# Altium PCB fpga.PcbDoc (part 4 of 6)
Units mm, origin at the board's own origin, x right, y up, seen from the top; angles counter-clockwise.
Board outline 111.63 x 111 mm, 2 copper layers (Top Layer, Bottom Layer); 5 components, 0 nets, 896 pads, 0 vias.
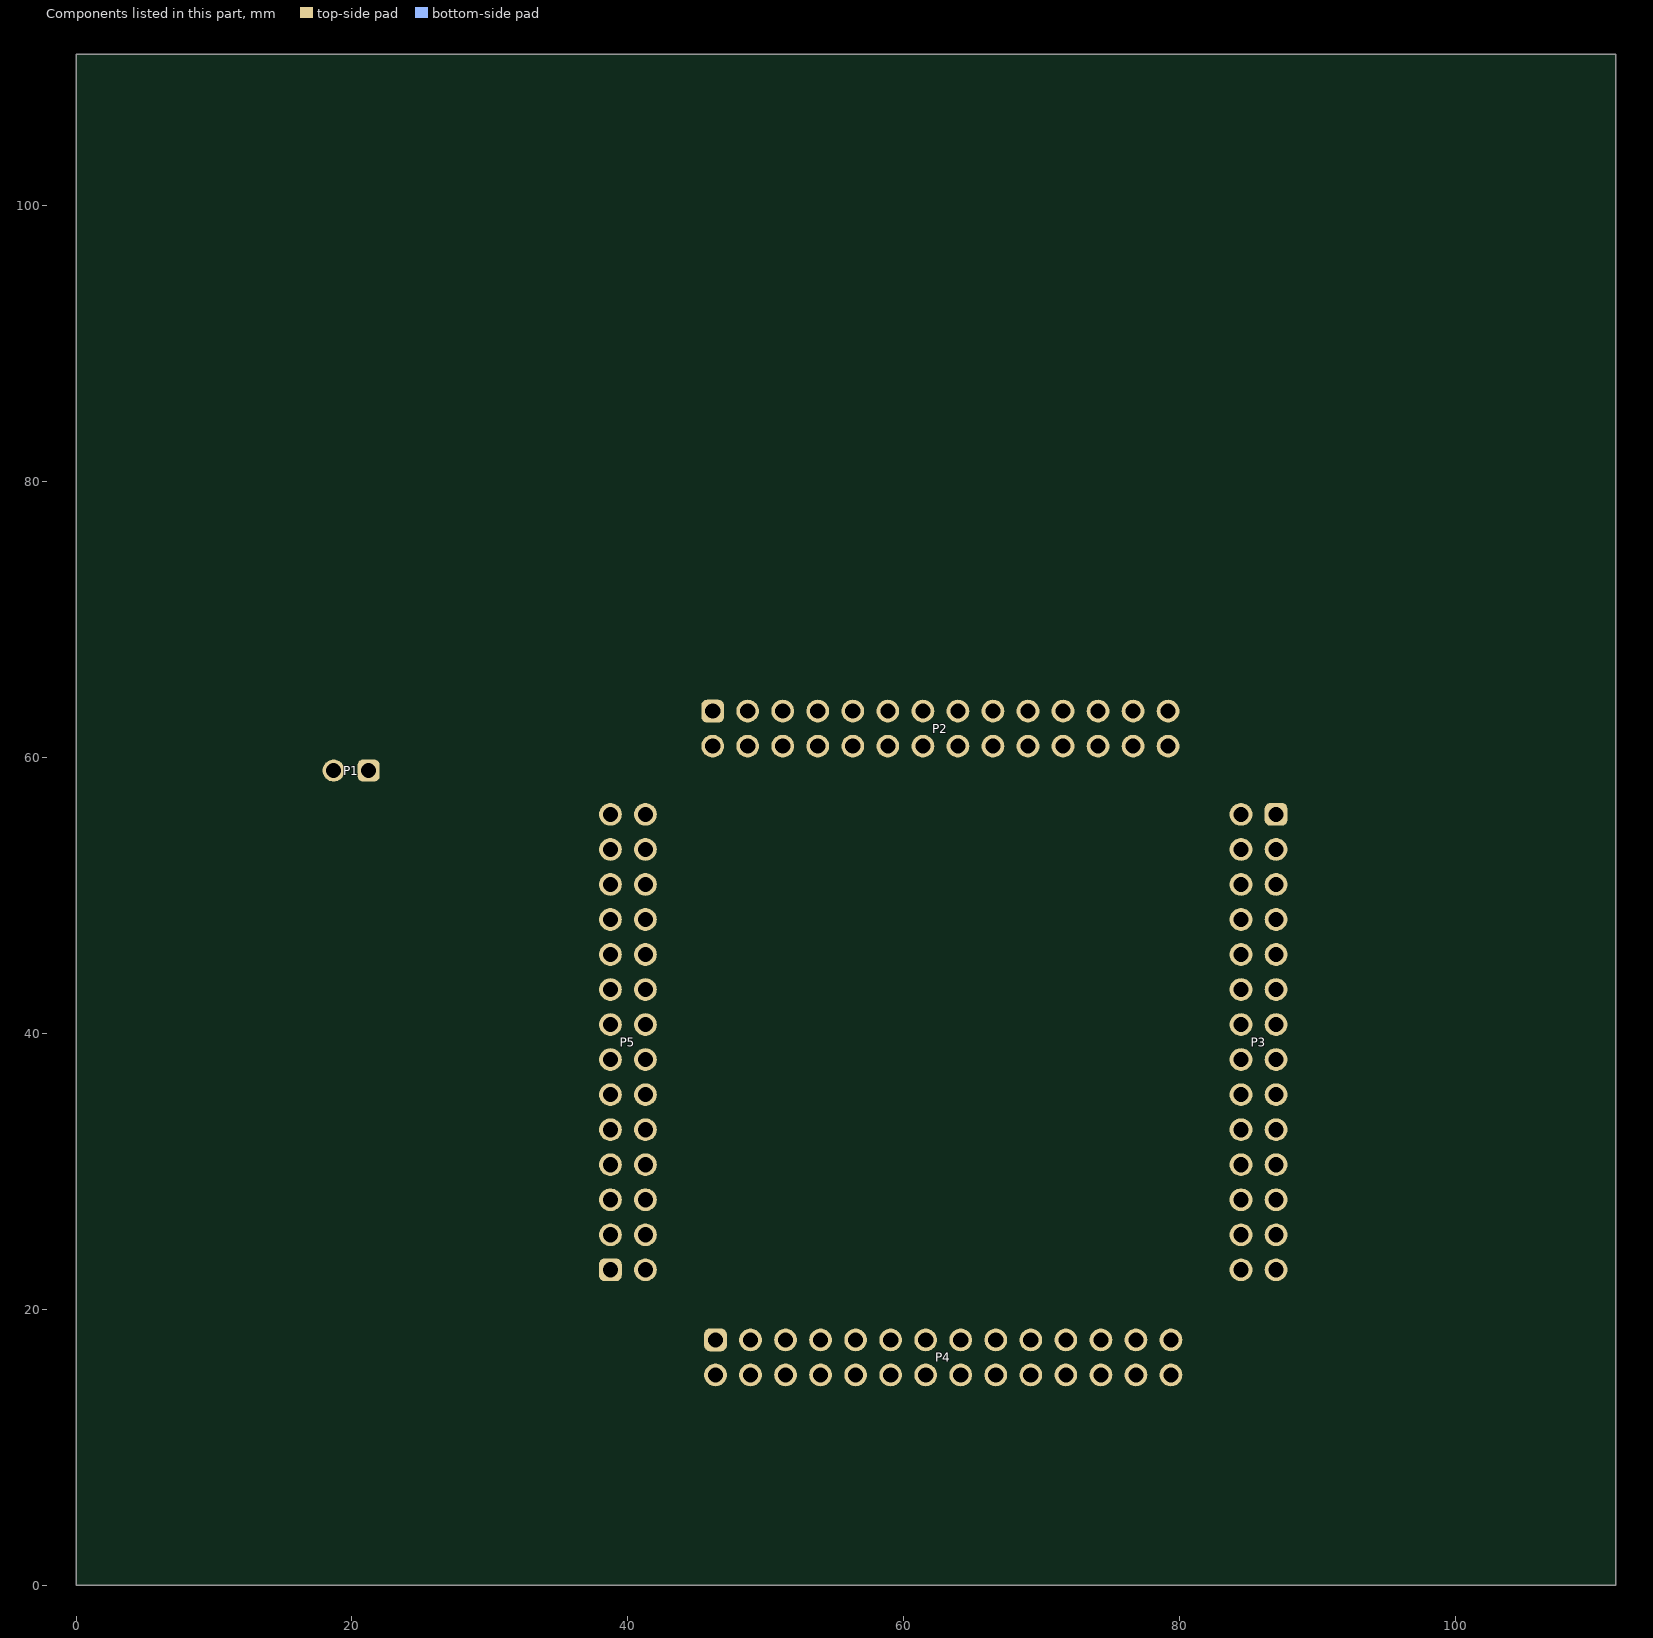
[diagram p4: the components of this part, seen from the top]

## Nets (pads, with @x,y where several pads share a name; then routed paths per layer and width w, separated by ;. In a path a pad name is that pad's centre, name@x,y a point inside that pad or via, vN(x,y) a via of type N, cw(c..) or ccw(c..) an arc to the next point about the centre after c; other vN are vias at no path point) (continued)
copper on no net: (continued)
  Top Layer w0.027: 5.697,35.195 5.722,35.22 5.747,35.195 ; 5.722,22.62 5.722,23.145 ; 5.722,22.62 5.747,22.595 ; 5.722,23.145 5.747,23.12 ; 5.722,28.295 5.722,27.845 5.747,27.82 ; 5.722,28.295 5.747,28.27 5.747,27.82 ; 5.722,29.67 5.722,30.145 ; 5.722,29.67 5.747,29.645 ; 5.722,30.145 5.747,30.12 ; 5.722,33.82 5.747,33.795 5.772,33.82 ; 5.747,22.595 8.872,22.595 ; 5.747,22.595 5.747,23.12 ; 5.747,23.12 5.772,23.145 ; 5.747,27.82 5.772,27.845 5.797,27.82 ; 5.747,29.645 5.747,30.12 ; 5.747,29.645 5.772,29.645 ; 5.747,30.12 5.772,30.145 ; 5.747,35.195 8.322,35.195 ; 5.772,23.145 5.772,22.595 5.797,22.57 ; 5.772,23.145 5.797,23.12 5.797,22.57 ; 5.772,29.645 5.772,30.145 ; 5.772,29.645 5.797,29.67 5.847,29.62 ; 5.772,29.645 5.797,29.62 5.822,29.645 ; 5.772,33.295 5.772,33.82 ; 5.797,22.57 5.822,22.595 5.847,22.57 ; 5.797,27.82 8.322,27.82 ; 5.797,35.17 5.822,35.195 5.847,35.17 ; 5.822,29.645 6.697,29.645 6.697,31.395 6.947,31.395 6.947,29.845 ; 5.822,33.795 5.847,33.77 5.872,33.795 ; 5.822,36.245 5.822,36.72 ; 5.847,22.57 5.872,22.595 ; 5.847,29.62 5.872,29.645 ; 5.847,35.17 8.472,35.17 ; 5.847,35.17 5.847,35.645 ; 5.872,22.595 5.872,23.12 ; 5.872,22.595 5.897,22.57 ; 5.872,23.12 5.897,23.095 ; 5.872,29.645 5.872,30.12 ; 5.872,29.645 5.897,29.62 ; 5.872,30.12 5.897,30.095 ; 5.872,33.795 5.872,33.295 5.897,33.27 ; 5.872,33.795 5.897,33.77 5.897,33.27 ; 5.897,22.57 6.897,22.57 ; 5.897,22.57 5.897,23.095 ; 5.897,23.095 5.922,23.12 ; 5.897,29.62 5.897,30.095 ; 5.897,29.62 5.922,29.62 ; 5.897,30.095 5.922,30.12 ; 5.897,35.145 5.922,35.17 5.947,35.145 ; 5.922,23.12 5.922,22.57 5.947,22.545 ; 5.922,23.12 5.947,23.095 5.947,22.545 ; 5.922,27.795 6.747,27.795 ; 5.922,29.62 5.922,30.12 ; 5.922,29.62 5.947,29.645 5.997,29.595 ; 5.922,29.62 5.947,29.595 5.972,29.62 ; 5.947,22.545 5.972,22.57 5.997,22.545 ; 5.947,35.145 8.622,35.145 ; 5.947,36.22 5.947,36.695 ; 5.947,36.695 5.972,36.67 5.997,36.695 ; 5.972,29.62 6.672,29.62 6.672,31.37 6.847,31.545 ; 5.972,33.77 5.972,33.27 5.997,33.245 ; 5.972,33.77 5.997,33.745 ; 5.972,35.62 5.997,35.595 6.022,35.62 ; 5.997,22.545 6.022,22.57 ; 5.997,29.595 6.022,29.62 6.047,29.595 ; 5.997,33.245 5.997,33.745 ; 5.997,33.245 6.022,33.27 ; 5.997,33.745 6.022,33.77 ; 6.022,22.57 6.022,23.095 ; 6.022,23.095 6.047,23.07 ; 6.022,33.27 6.022,33.77 ; 6.022,33.27 6.047,33.245 ; 6.022,33.77 6.047,33.745 ; 6.022,35.62 6.022,35.145 6.047,35.12 ; 6.022,35.62 6.047,35.595 6.047,35.12 ; 6.047,23.07 6.047,22.52 6.072,22.545 ; 6.047,23.07 6.072,23.095 ; 6.047,29.595 6.072,29.595 ; 6.047,33.245 6.047,33.745 ; 6.047,33.745 6.072,33.77 ; 6.047,35.12 6.072,35.145 6.097,35.12 ; 6.047,36.195 6.072,36.22 6.097,36.195 ; 6.072,22.545 6.072,23.095 ; 6.072,22.545 6.097,22.52 ; 6.072,23.095 6.097,23.07 6.097,22.52 ; 6.072,27.77 6.697,27.77 ; 6.072,29.595 6.072,30.095 ; 6.072,29.595 6.097,29.62 6.147,29.57 ; 6.072,29.595 6.097,29.57 6.122,29.595 ; 6.097,22.52 6.122,22.545 ; 6.097,35.12 8.772,35.12 ; 6.097,36.195 6.947,36.195 6.947,33.495 ; 6.122,22.545 6.122,23.07 ; 6.122,22.545 6.147,22.52 ; 6.122,23.07 6.147,23.045 ; 6.122,29.595 6.647,29.595 ; 6.122,33.745 6.147,33.72 6.172,33.745 ; 6.122,35.595 6.147,35.57 6.172,35.595 ; 6.122,36.67 6.147,36.645 6.172,36.67 ; 6.147,22.52 6.147,23.045 ; 6.147,22.52 6.172,22.545 ; 6.147,23.045 6.172,23.07 ; 6.147,29.57 6.172,29.595 6.197,29.57 ; 6.172,22.545 6.172,23.07 ; 6.172,22.545 6.197,22.52 6.822,22.52 6.822,22.82 ; 6.172,23.07 6.197,23.045 6.197,22.495 6.222,22.52 6.247,22.495 ; 6.172,28.22 6.172,27.77 6.197,27.745 ; 6.172,28.22 6.197,28.195 6.197,27.745 ; 6.172,33.22 6.172,33.745 ; 6.172,33.745 6.197,33.72 6.222,33.745 ; 6.172,35.595 6.172,35.12 6.197,35.095 ; 6.172,35.595 6.197,35.57 6.197,35.095 ; 6.197,27.745 6.222,27.77 6.247,27.745 ; 6.197,29.57 6.597,29.57 6.597,30.195 ; 6.197,35.095 6.222,35.12 6.247,35.095 ; 6.222,30.07 6.222,29.57 6.247,29.545 ; 6.222,30.07 6.247,30.045 6.247,29.545 ; 6.222,36.17 6.972,36.17 ; 6.247,22.495 6.272,22.52 ; 6.247,27.745 6.647,27.745 ; 6.247,29.545 6.272,29.57 6.297,29.545 ; 6.247,35.095 6.272,35.12 6.297,35.095 ; 6.272,22.52 6.272,23.045 ; 6.272,22.52 6.297,22.495 ; 6.272,23.045 6.297,23.02 ; 6.272,33.72 6.272,33.22 6.297,33.195 ; 6.272,33.72 6.297,33.695 ; 6.297,22.495 6.297,23.02 ; 6.297,22.495 6.322,22.52 ; 6.297,23.02 6.322,23.045 ; 6.297,33.195 6.297,33.695 ; 6.297,33.195 6.647,33.195 6.647,34.245 ; 6.297,33.695 6.322,33.72 ; 6.297,35.095 6.297,35.57 ; 6.297,35.095 6.322,35.12 6.347,35.095 8.872,35.095 ; 6.322,22.52 6.322,23.045 ; 6.322,22.52 6.347,22.495 6.797,22.495 ; 6.322,23.045 6.347,23.02 ; 6.322,28.195 6.322,27.745 6.347,27.72 ; 6.322,28.195 6.347,28.17 6.347,27.72 ; 6.322,30.045 6.347,30.02 6.372,30.045 ; 6.322,36.645 6.322,36.17 6.347,36.145 ; 6.322,36.645 6.347,36.62 6.347,36.145 ; 6.347,23.02 6.347,22.47 6.372,22.495 ; 6.347,23.02 6.372,23.045 ; 6.347,27.72 6.372,27.745 6.397,27.72 ; 6.347,36.145 6.372,36.17 6.397,36.145 ; 6.372,22.495 6.372,23.045 ; 6.372,22.495 6.397,22.47 ; 6.372,23.045 6.397,23.02 6.397,22.47 ; 6.372,30.045 6.372,29.545 6.397,29.52 ; 6.372,30.045 6.397,30.02 6.397,29.52 ; 6.372,35.095 6.372,35.545 ; 6.372,35.095 6.397,35.07 ; 6.372,35.545 6.397,35.52 ; 6.397,22.47 6.422,22.495 ; 6.397,27.72 6.597,27.72 ; 6.397,29.52 6.422,29.545 6.447,29.52 ; 6.397,33.17 6.422,33.195 ; 6.397,35.07 6.397,35.52 ; 6.397,35.07 6.422,35.095 ; 6.397,35.52 6.422,35.545 ; 6.397,36.145 6.447,36.145 ; 6.422,22.495 6.422,23.02 ; 6.422,22.495 6.447,22.47 ; 6.422,23.02 6.447,22.995 ; 6.422,33.195 6.422,33.695 ; 6.422,33.195 6.447,33.17 ; 6.422,33.695 6.447,33.67 ; 6.422,35.095 6.422,35.545 ; 6.422,35.095 6.472,35.045 6.497,35.07 ; 6.422,35.545 6.447,35.52 6.447,35.07 6.472,35.095 6.522,35.045 ; 6.447,22.47 6.447,22.995 ; 6.447,22.995 6.472,23.02 ; 6.447,29.52 6.472,29.545 6.497,29.52 ; 6.447,33.17 6.447,33.67 ; 6.447,33.17 6.572,33.17 ; 6.447,33.67 6.472,33.695 ; 6.447,36.145 6.472,36.17 6.497,36.145 6.972,36.145 6.997,36.12 6.997,33.545 ; 6.472,23.02 6.472,22.47 6.497,22.445 ; 6.472,23.02 6.497,22.995 6.497,22.445 ; 6.497,22.445 6.522,22.47 6.547,22.445 ; 6.497,29.52 6.522,29.545 6.547,29.52 ; 6.497,35.07 9.047,35.07 ; 6.497,36.62 6.497,36.12 6.522,36.145 6.547,36.12 ; 6.522,35.045 9.172,35.045 ; 6.547,22.445 6.572,22.47 ; 6.547,27.695 6.547,28.145 ; 6.547,28.145 6.697,27.995 6.697,27.77 ; 6.547,29.52 6.622,29.595 6.622,30.97 ; 6.547,36.12 7.022,36.12 ; 6.572,22.47 6.572,22.995 ; 6.572,22.47 6.597,22.445 ; 6.572,22.995 6.597,22.97 ; 6.572,33.17 6.572,33.695 ; 6.572,33.17 6.597,33.195 6.597,33.72 ; 6.572,36.595 6.772,36.395 ; 6.597,22.445 6.597,22.97 ; 6.597,22.445 6.722,22.445 ; 6.597,22.97 6.622,22.995 ; 6.597,30.195 6.622,30.22 6.597,30.245 ; 6.597,30.245 6.622,30.27 6.597,30.295 ; 6.597,30.295 6.597,30.32 ; 6.597,30.32 6.622,30.345 6.597,30.37 ; 6.597,30.37 6.622,30.395 6.597,30.42 ; 6.597,30.42 6.622,30.445 6.597,30.47 ; 6.597,30.47 6.622,30.495 6.597,30.52 ; 6.597,30.52 6.622,30.545 6.597,30.57 ; 6.597,30.57 6.622,30.595 6.597,30.62 ; 6.597,30.62 6.622,30.645 6.597,30.67 ; 6.597,34.97 9.422,34.97 ; 6.597,34.97 6.647,34.92 ; 6.622,30.97 7.072,30.97 ; 6.622,30.97 6.647,30.995 6.622,31.02 ; 6.622,31.02 7.047,31.02 7.072,31.045 ; 6.622,31.02 6.647,31.045 ; 6.622,31.07 7.047,31.07 ; 6.622,31.07 6.647,31.095 ; 6.622,31.07 6.647,31.045 ; 6.622,31.12 7.047,31.12 ; 6.622,31.12 6.647,31.145 ; 6.622,31.12 6.647,31.095 ; 6.622,31.17 7.047,31.17 ; 6.622,31.17 6.647,31.195 ; 6.622,31.17 6.647,31.145 ; 6.622,31.22 7.047,31.22 ; 6.622,31.22 6.647,31.245 ; 6.622,31.22 6.647,31.195 ; 6.622,31.27 7.047,31.27 7.047,30.12 ; 6.622,31.27 6.647,31.295 6.622,31.32 7.022,31.32 ; 6.622,31.27 6.647,31.245 ; 6.622,31.82 7.047,31.82 ; 6.622,31.82 6.647,31.845 ; 6.622,31.82 6.672,31.77 7.047,31.77 7.047,32.82 ; 6.622,31.87 7.072,31.87 ; 6.622,31.87 6.622,31.97 ; 6.622,31.87 6.647,31.845 ; 6.622,31.97 7.047,31.97 ; 6.622,31.97 6.647,31.995 ; 6.622,32.02 7.072,32.02 ; 6.622,32.02 6.622,32.07 ; 6.622,32.02 6.647,31.995 ; 6.622,32.07 7.072,32.07 ; 6.622,32.07 6.647,32.095 6.622,32.12 ; 6.622,32.12 6.647,32.145 6.622,32.17 ; 6.622,32.17 6.647,32.195 6.622,32.22 ; 6.622,32.22 6.647,32.245 6.622,32.27 ; 6.622,32.27 6.647,32.295 6.622,32.32 ; 6.622,32.32 7.097,32.32 7.097,32.82 7.122,32.845 ; 6.622,32.32 6.647,32.345 ; 6.622,32.37 9.722,32.37 ; 6.622,32.37 6.647,32.395 ; 6.622,32.37 6.647,32.345 ; 6.622,33.845 6.647,33.87 6.622,33.895 ; 6.622,33.895 6.647,33.92 6.622,33.945 ; 6.622,33.945 6.647,33.97 6.622,33.995 ; 6.622,34.595 7.097,34.595 ; 6.622,34.77 7.097,34.77 ; 6.622,34.945 9.447,34.945 9.447,34.545 ; 6.622,34.945 6.622,35.57 ; 6.622,34.945 6.597,34.92 6.647,34.87 ; 6.622,35.57 6.647,35.595 6.622,35.62 ; 6.622,35.62 6.647,35.645 6.622,35.67 ; 6.622,35.77 6.647,35.795 6.622,35.82 ; 6.622,35.82 6.647,35.845 6.622,35.87 ; 6.622,35.87 6.647,35.895 6.622,35.92 ; 6.622,35.92 6.647,35.945 6.622,35.97 ; 6.622,35.97 6.647,35.995 ; 6.622,36.02 7.047,36.02 ; 6.622,36.02 6.647,36.045 ; 6.622,36.02 6.647,35.995 ; 6.622,36.07 7.022,36.07 ; 6.622,36.07 6.647,36.045 ; 6.647,29.595 6.647,31.32 6.672,31.345 ; 6.647,31.045 7.072,31.045 ; 6.647,31.095 7.072,31.095 ; 6.647,31.145 7.072,31.145 ; 6.647,31.195 7.072,31.195 ; 6.647,31.245 7.072,31.245 ; 6.647,31.845 7.072,31.845 ; 6.647,31.995 7.072,31.995 ; 6.647,32.345 7.197,32.345 7.222,32.37 7.247,32.345 9.772,32.345 9.772,29.12 9.697,29.045 ; 6.647,32.395 9.622,32.395 ; 6.647,32.395 6.622,32.42 9.522,32.42 ; 6.647,34.245 6.672,34.27 6.622,34.32 6.672,34.37 6.647,34.395 ; 6.647,34.245 6.622,34.27 6.672,34.32 6.622,34.37 6.647,34.395 ; 6.647,34.87 7.097,34.87 ; 6.647,34.87 6.622,34.845 7.072,34.845 ; 6.647,34.92 6.597,34.87 6.647,34.82 7.097,34.82 ; 6.647,35.995 7.072,35.995 ; 6.647,36.045 7.072,36.045 7.047,36.02 ; 6.672,31.745 6.672,32.47 6.972,32.77 ; 6.672,31.745 7.022,31.745 7.022,32.795 7.422,32.795 ; 6.672,31.745 6.772,31.645 ; 6.672,32.445 9.372,32.445 ; 6.672,32.445 6.647,32.42 6.647,31.795 7.072,31.795 ; 6.672,32.445 6.647,32.47 9.247,32.47 ; 6.722,22.445 6.722,22.945 ; 6.722,22.445 6.772,22.495 6.772,22.895 ; 6.722,22.945 6.772,22.895 ; 6.747,27.795 6.772,27.82 6.772,27.945 ; 6.772,27.945 6.822,27.895 6.922,27.995 ; 6.772,29.695 6.872,29.795 6.872,31.52 ; 6.772,31.645 6.772,32.57 8.672,32.57 ; 6.772,31.645 6.897,31.645 6.922,31.67 6.922,32.72 7.872,32.72 ; 6.822,31.595 6.822,32.62 8.422,32.62 ; 6.822,31.595 6.797,31.595 6.822,31.62 ; 6.822,31.595 6.872,31.645 ; 6.822,31.595 6.847,31.57 6.847,31.545 ; 6.822,31.62 6.847,31.62 ; 6.822,31.62 6.797,31.645 6.797,32.595 8.572,32.595 ; 6.847,31.495 6.872,31.52 ; 6.847,31.495 6.797,31.545 6.847,31.545 ; 6.847,31.545 6.872,31.52 ; 6.847,31.62 6.847,32.645 8.272,32.645 ; 6.872,31.645 6.872,32.67 8.147,32.67 ; 6.872,31.645 6.897,31.62 ; 6.897,22.57 6.897,22.72 ; 6.897,22.57 6.922,22.595 6.947,22.57 ; 6.897,27.745 8.847,27.745 ; 6.897,27.745 6.897,27.97 7.522,27.97 ; 6.897,31.62 6.897,32.695 7.972,32.695 ; 6.922,27.995 7.372,27.995 ; 6.922,27.995 6.922,27.745 6.947,27.72 8.922,27.72 ; 6.947,22.57 9.047,22.57 ; 6.947,22.57 6.947,22.67 7.097,22.82 ; 6.947,29.845 7.022,29.92 ; 6.947,31.67 6.947,32.745 7.722,32.745 ; 6.947,31.67 6.747,31.67 6.747,32.545 8.847,32.545 ; 6.947,31.67 7.072,31.795 ; 6.947,33.495 6.997,33.545 ; 6.972,32.77 6.972,31.695 6.722,31.695 6.722,32.52 8.972,32.52 ; 6.972,32.77 7.597,32.77 ; 6.997,28.045 7.022,28.045 ; 6.997,28.045 6.947,27.995 6.947,27.695 9.072,27.695 ; 7.022,22.495 7.022,22.745 8.022,22.745 ; 7.022,22.495 7.047,22.52 ; 7.022,22.495 7.047,22.47 ; 7.022,28.045 7.047,28.02 ; 7.022,29.92 7.022,31.32 ; 7.022,29.995 7.047,30.02 ; 7.022,29.995 7.047,29.97 ; 7.022,36.07 7.047,36.095 ; 7.022,36.12 7.047,36.095 ; 7.047,22.47 7.072,22.495 ; 7.047,22.52 7.047,22.77 7.922,22.77 ; 7.047,22.52 7.072,22.495 ; 7.047,28.02 7.047,27.595 7.072,27.62 ; 7.047,28.02 7.072,28.045 ; 7.047,30.02 7.022,30.045 7.047,30.07 ; 7.047,30.07 7.022,30.095 7.047,30.12 ; 7.047,31.07 7.072,31.095 ; 7.047,31.07 7.072,31.045 ; 7.047,31.12 7.072,31.145 ; 7.047,31.12 7.072,31.095 ; 7.047,31.17 7.072,31.195 ; 7.047,31.17 7.072,31.145 ; 7.047,31.22 7.072,31.245 ; 7.047,31.22 7.072,31.195 ; 7.047,31.82 7.072,31.845 ; 7.047,31.82 7.072,31.795 ; 7.047,31.97 7.072,31.995 ; 7.047,31.97 7.072,31.945 ; 7.047,32.82 7.322,32.82 ; 7.047,32.82 6.997,32.77 6.997,31.72 6.697,31.72 6.697,32.495 9.072,32.495 ; 7.047,36.02 7.072,35.995 ; 7.072,22.495 9.472,22.495 ; 7.072,27.62 7.072,28.045 ; 7.072,27.62 7.097,27.595 9.372,27.595 ; 7.072,28.045 7.097,28.02 7.097,27.57 7.122,27.595 7.147,27.57 ; 7.072,31.845 7.072,31.87 ; 7.072,31.87 7.047,31.895 7.072,31.92 ; 7.072,31.92 7.072,31.945 ; 7.072,31.995 7.072,32.02 ; 7.072,32.02 7.047,32.045 7.072,32.07 ; 7.072,33.645 7.072,35.995 ; 7.072,34.845 7.097,34.87 ; 7.072,34.845 7.097,34.82 ; 7.072,34.895 7.122,34.945 ; 7.072,34.895 7.097,34.87 ; 7.097,22.82 7.647,22.82 ; 7.097,34.77 7.072,34.795 7.097,34.82 ; 7.122,32.845 7.172,32.845 ; 7.122,34.945 7.122,35.42 ; 7.122,34.945 7.147,34.92 ; 7.122,35.42 7.147,35.395 7.147,34.92 ; 7.147,34.92 9.472,34.92 9.472,34.57 9.447,34.545 ; 7.172,22.395 7.172,22.87 ; 7.172,22.395 7.147,22.37 7.147,22.845 7.497,22.845 ; 7.172,22.87 7.322,22.87 ; 7.172,32.845 7.172,32.345 7.197,32.32 7.197,32.82 7.172,32.845 ; 7.197,27.545 7.222,27.57 ; 7.222,27.57 7.222,28.02 ; 7.222,27.57 7.247,27.545 ; 7.222,28.02 6.972,28.02 6.972,27.695 6.997,27.67 9.272,27.67 ; 7.222,28.02 7.247,27.995 7.247,27.545 ; 7.247,22.32 7.272,22.345 7.297,22.32 ; 7.247,27.545 9.422,27.545 9.422,27.195 ; 7.247,35.395 7.247,34.92 7.272,34.895 ; 7.247,35.395 7.272,35.37 7.272,34.895 ; 7.272,34.895 7.297,34.92 7.322,34.895 ; 7.297,32.32 7.322,32.345 ; 7.322,22.87 7.322,22.32 7.347,22.295 ; 7.322,22.87 7.347,22.845 ; 7.322,32.345 7.322,32.82 ; 7.322,32.345 7.347,32.32 ; 7.322,32.82 7.347,32.795 7.347,32.32 ; 7.322,34.895 9.497,34.895 9.497,34.57 ; 7.347,22.295 7.347,22.845 ; 7.347,22.295 7.372,22.32 ; 7.347,22.845 7.372,22.87 ; 7.347,27.52 7.372,27.545 ; 7.347,32.32 9.772,32.32 9.822,32.27 ; 7.372,22.32 7.372,22.87 ; 7.372,22.32 7.397,22.295 ; 7.372,22.87 7.397,22.845 7.397,22.295 ; 7.372,27.545 7.372,27.995 ; 7.372,27.545 7.397,27.52 ; 7.372,27.995 7.397,27.97 7.397,27.52 ; 7.397,27.52 9.447,27.52 9.447,27.22 9.097,27.22 ; 7.397,32.295 7.422,32.32 ; 7.422,32.32 7.422,32.795 ; 7.422,32.32 7.447,32.295 ; 7.422,32.795 7.447,32.77 ; 7.447,32.295 9.797,32.295 9.797,29.12 ; 7.447,32.295 7.447,32.77 ; 7.447,32.77 7.472,32.795 ; 7.447,34.87 9.522,34.87 ; 7.472,32.795 7.472,32.295 7.497,32.27 ; 7.472,32.795 7.497,32.77 7.497,32.27 ; 7.497,22.27 7.497,22.845 ; 7.497,22.27 7.522,22.295 7.547,22.27 ; 7.497,32.27 7.522,32.295 7.547,32.27 ; 7.522,27.495 9.472,27.495 ; 7.522,27.495 7.522,27.97 ; 7.547,32.27 9.822,32.27 ; 7.597,34.845 9.522,34.845 9.547,34.82 9.547,34.62 ; 7.622,35.32 7.647,35.295 7.672,35.32 ; 7.647,22.245 7.647,22.82 ; 7.647,22.245 7.672,22.27 7.697,22.245 ; 7.647,32.245 7.672,32.27 7.697,32.245 ; 7.672,27.47 9.472,27.47 9.497,27.445 9.497,27.27 8.822,27.27 ; 7.672,27.47 7.672,27.945 ; 7.672,27.945 6.872,27.945 6.872,27.77 8.672,27.77 ; 7.672,35.32 7.672,34.845 7.697,34.82 ; 7.672,35.32 7.697,35.295 7.697,34.82 ; 7.697,34.82 7.722,34.845 7.747,34.82 ; 7.747,22.22 7.772,22.245 ; 7.747,34.82 9.572,34.82 9.572,34.67 9.547,34.645 8.722,34.645 ; 7.772,22.245 7.772,22.795 ; 7.772,22.245 7.797,22.22 ; 7.772,22.795 7.797,22.77 7.797,22.22 ; 7.797,22.22 7.822,22.245 7.847,22.22 ; 7.797,27.92 6.847,27.92 6.847,27.795 8.472,27.795 ; 7.797,27.92 7.797,27.47 7.822,27.445 ; 7.797,27.92 7.822,27.895 7.822,27.445 ; 7.797,32.22 7.822,32.245 7.847,32.22 ; 7.822,27.445 9.522,27.445 9.522,27.295 8.672,27.295 ; 7.847,32.22 7.872,32.245 ; 7.872,32.245 7.872,32.72 ; 7.872,32.245 7.897,32.22 ; 7.872,32.72 7.897,32.695 7.897,32.22 ; 7.872,34.795 9.572,34.795 9.622,34.745 ; 7.897,32.22 9.822,32.22 9.847,32.195 ; 7.922,22.195 7.922,22.77 ; 7.922,22.195 7.947,22.22 7.972,22.195 ; 7.947,27.42 7.947,27.895 ; 7.947,27.42 7.972,27.445 7.997,27.42 ; 7.947,32.195 7.972,32.22 ; 7.972,32.22 7.972,32.695 ; 7.972,32.22 7.997,32.195 ; 7.972,32.695 7.997,32.67 ; 7.997,27.42 9.522,27.42 9.547,27.395 9.547,27.32 8.522,27.32 ; 7.997,32.195 9.847,32.195 ; 7.997,32.195 7.997,32.67 ; 7.997,32.67 8.022,32.695 ; 8.022,22.745 8.022,22.195 8.047,22.17 ; 8.022,22.745 8.047,22.72 ; 8.022,34.77 9.597,34.77 9.572,34.745 ; 8.022,34.77 8.022,35.245 ; 8.022,35.245 8.047,35.22 8.072,35.245 ; 8.047,22.17 8.047,22.72 ; 8.047,22.17 8.072,22.195 ; 8.047,22.72 8.072,22.745 ; 8.072,22.195 8.072,22.745 ; 8.072,22.195 8.097,22.17 ; 8.072,22.745 8.097,22.72 8.097,22.17 ; 8.097,27.395 8.097,27.87 ; 8.097,27.395 8.122,27.42 8.147,27.395 ; 8.097,32.17 8.122,32.195 8.147,32.17 ; 8.147,27.395 9.572,27.395 9.547,27.37 ; 8.147,32.17 9.847,32.17 9.872,32.145 ; 8.147,32.17 8.147,32.67 ; 8.147,34.745 9.572,34.745 ; 8.172,27.845 8.197,27.82 8.222,27.845 ; 8.197,22.145 8.197,22.72 ; 8.197,22.145 8.222,22.17 8.247,22.145 ; 8.197,22.72 6.997,22.72 6.997,22.545 9.197,22.545 ; 8.222,27.845 8.222,27.395 8.247,27.37 ; 8.222,27.845 8.247,27.82 8.247,27.37 ; 8.247,22.145 9.972,22.145 ; 8.247,27.37 9.547,27.37 ; 8.247,32.145 8.272,32.17 ; 8.272,32.17 8.272,32.645 ; 8.272,32.17 8.297,32.145 ; 8.272,32.645 8.297,32.62 8.297,32.145 ; 8.297,32.145 9.872,32.145 ; 8.297,34.72 9.622,34.72 ; 8.322,27.82 8.347,27.795 8.372,27.82 ; 8.347,22.12 8.347,22.695 ; 8.347,22.12 8.372,22.145 8.397,22.12 ; 8.347,22.695 6.972,22.695 6.972,22.57 7.022,22.52 9.322,22.52 ; 8.372,27.345 9.572,27.345 ; 8.372,27.345 8.372,27.82 ; 8.397,22.12 9.947,22.12 ; 8.397,32.12 8.422,32.145 ; 8.422,32.145 8.422,32.62 ; 8.422,32.145 8.447,32.12 ; 8.422,32.62 8.447,32.595 8.447,32.12 ; 8.422,34.695 9.597,34.695 9.622,34.72 ; 8.447,32.12 9.847,32.12 ; 8.472,22.67 8.472,22.12 8.497,22.095 ; 8.472,22.67 8.497,22.645 8.497,22.095 ; 8.472,27.795 8.497,27.77 8.522,27.795 ; 8.497,22.095 8.522,22.12 8.547,22.095 ; 8.522,27.32 8.522,27.795 ; 8.547,22.095 9.922,22.095 ; 8.572,32.095 9.872,32.095 ; 8.572,32.095 8.572,32.595 ; 8.572,34.67 9.597,34.67 9.597,34.72 ; 8.622,22.645 8.622,22.095 8.647,22.07 ; 8.622,22.645 8.647,22.62 8.647,22.07 ; 8.647,22.07 8.672,22.095 8.697,22.07 ; 8.672,27.295 8.672,27.77 ; 8.672,32.57 8.672,32.095 8.697,32.07 ; 8.672,32.57 8.697,32.545 ; 8.697,22.07 9.947,22.07 ; 8.697,32.07 8.697,32.545 ; 8.697,32.545 8.722,32.57 ; 8.822,22.045 9.897,22.045 ; 8.822,34.62 8.847,34.645 8.872,34.62 ; 8.847,32.045 8.847,32.545 ; 8.872,22.595 8.897,22.57 8.922,22.595 ; 8.872,34.62 9.547,34.62 ; 8.872,34.62 8.872,35.095 ; 8.872,35.095 8.897,35.07 8.922,35.095 ; 8.922,27.72 8.947,27.695 8.972,27.72 ; 8.972,22.02 9.922,22.02 9.897,22.045 ; 8.972,27.245 9.472,27.245 9.472,27.495 ; 8.972,27.245 8.972,27.72 ; 8.972,32.52 8.972,32.045 8.997,32.02 ; 8.972,32.52 8.997,32.495 8.997,32.02 ; 8.997,34.595 9.522,34.595 9.522,34.87 ; 9.072,27.695 9.072,27.245 9.097,27.22 ; 9.072,27.695 9.097,27.67 ; 9.072,32.495 9.097,32.47 9.122,32.495 ; 9.097,27.22 9.097,27.67 ; 9.097,27.67 9.122,27.695 ; 9.097,34.57 9.122,34.595 9.147,34.57 ; 9.122,21.995 9.897,21.995 ; 9.122,32.495 9.122,32.02 9.147,31.995 ; 9.122,32.495 9.147,32.47 9.147,31.995 ; 9.147,34.57 9.497,34.57 ; 9.197,27.195 9.222,27.22 9.247,27.195 ; 9.247,27.195 9.422,27.195 ; 9.272,21.97 9.847,21.97 9.872,21.995 9.872,25.195 ; 9.272,34.545 9.447,34.545 ; 9.372,27.595 9.472,27.495 ; 9.372,34.995 9.372,34.545 9.397,34.52 ; 9.372,34.995 9.397,34.97 9.397,34.52 ; 9.397,34.52 9.422,34.545 9.422,34.97 ; 9.422,21.945 9.797,21.945 9.822,21.97 ; 9.422,27.195 9.572,27.345 ; 9.422,31.37 9.447,31.395 9.422,31.42 ; 9.422,31.37 9.497,31.295 ; 9.422,31.42 9.447,31.445 9.422,31.47 ; 9.422,31.47 9.447,31.495 9.422,31.52 ; 9.422,31.52 9.447,31.545 9.422,31.57 ; 9.422,31.57 9.447,31.595 9.422,31.62 ; 9.422,31.62 9.447,31.645 9.422,31.67 ; 9.422,31.67 9.447,31.695 9.422,31.72 ; 9.422,31.72 9.447,31.745 9.422,31.77 ; 9.422,34.97 9.522,34.87 ; 9.447,30.82 9.447,29.02 9.472,29.045 ; 9.472,29.045 9.497,29.02 9.647,29.02 ; 9.472,31.32 9.847,31.32 ; 9.472,31.32 9.447,31.295 9.497,31.245 ; 9.497,31.245 9.847,31.245 ; 9.497,31.295 9.872,31.295 ; 9.497,31.295 9.472,31.27 9.872,31.27 ; 9.497,34.57 9.547,34.62 ; 9.522,28.995 9.547,29.02 ; 9.522,28.995 9.547,28.97 9.572,28.995 ; 9.522,32.42 9.547,32.395 9.547,31.22 9.872,31.22 ; 9.547,21.92 9.572,21.945 ; 9.547,27.37 9.572,27.345 ; 9.547,29.02 9.547,30.945 ; 9.547,29.02 9.572,28.995 ; 9.547,30.945 9.522,30.97 9.572,31.02 9.597,30.995 ; 9.572,21.945 9.572,22.695 ; 9.572,21.945 9.597,21.92 ; 9.572,22.695 9.597,22.72 9.572,22.745 ; 9.572,22.745 9.597,22.77 9.572,22.795 ; 9.572,22.795 9.997,22.795 ; 9.572,28.995 9.572,30.97 ; 9.572,28.995 9.597,28.995 ; 9.572,34.745 9.597,34.72 ; 9.597,21.92 9.597,23.095 ; 9.597,21.92 9.747,21.92 ; 9.597,23.095 9.972,23.095 ; 9.597,23.095 9.622,23.12 ; 9.597,23.095 9.572,23.12 9.597,23.145 ; 9.597,23.145 9.972,23.145 ; 9.597,23.145 9.597,23.17 ; 9.597,23.145 9.622,23.12 ; 9.597,23.17 9.997,23.17 ; 9.597,23.17 9.622,23.195 9.572,23.245 9.622,23.295 9.572,23.345 9.622,23.395 9.572,23.445 9.622,23.495 9.572,23.545 9.622,23.595 ; 9.597,23.17 9.572,23.195 9.622,23.245 9.572,23.295 9.622,23.345 9.572,23.395 9.622,23.445 9.572,23.495 9.622,23.545 ; 9.597,28.995 9.597,30.995 ; 9.597,28.995 9.622,29.02 9.622,31.045 ; 9.597,34.72 9.622,34.745 ; 9.622,23.12 9.997,23.12 ; 9.622,23.545 9.997,23.545 ; 9.622,23.545 9.597,23.57 9.972,23.57 ; 9.622,23.595 9.997,23.595 ; 9.622,23.87 9.697,23.945 ; 9.622,24.92 9.672,24.97 9.647,24.995 ; 9.622,32.395 9.647,32.37 ; 9.622,34.72 9.622,34.745 ; 9.647,24.945 9.647,24.195 9.697,24.145 9.672,24.12 ; 9.647,24.945 9.622,24.97 9.647,24.995 ; 9.647,29.02 9.647,32.37 ; 9.647,29.02 9.672,29.045 9.672,32.395 ; 9.647,32.37 9.672,32.395 ; 9.672,24.12 9.647,24.145 9.672,24.17 ; 9.672,24.17 9.672,24.995 9.697,25.02 ; 9.672,32.395 9.697,32.37 9.697,29.045 ; 9.722,24.07 9.722,25.02 9.747,25.045 9.722,25.07 9.997,25.07 ; 9.747,21.92 9.747,25.07 9.797,25.12 ; 9.747,21.92 9.772,21.945 ; 9.772,21.945 9.772,25.095 9.972,25.095 9.997,25.07 ; 9.772,21.945 9.797,21.92 9.797,25.12 ; 9.797,29.12 9.822,29.145 9.822,32.27 ; 9.822,21.97 9.822,25.12 9.847,25.145 9.972,25.145 ; 9.822,21.97 9.847,21.945 9.847,25.17 ; 9.847,25.17 9.872,25.17 ; 9.847,25.17 9.872,25.195 ; 9.847,31.245 9.872,31.27 ; 9.847,31.245 9.872,31.22 ; 9.847,31.32 9.872,31.345 ; 9.847,31.32 9.872,31.295 ; 9.847,32.12 9.872,32.145 ; 9.847,32.12 9.872,32.095 ; 9.872,25.17 9.897,25.195 9.922,25.17 ; 9.872,25.17 9.897,25.145 ; 9.872,25.195 9.922,25.195 ; 9.872,29.195 9.872,29.795 ; 9.872,29.795 9.847,29.82 9.872,29.845 ; 9.872,29.845 9.872,29.895 ; 9.872,29.895 9.847,29.92 9.872,29.945 ; 9.872,29.945 9.872,29.995 ; 9.872,29.995 9.847,30.02 9.872,30.045 ; 9.872,30.045 9.872,31.145 ; 9.872,31.145 9.847,31.17 9.872,31.195 ; 9.872,31.195 9.872,31.22 ; 9.872,31.27 9.872,31.295 ; 9.872,31.345 9.872,32.095 ; 9.897,21.995 9.897,25.145 ; 9.897,21.995 9.947,22.045 ; 9.897,22.045 9.922,22.07 ; 9.897,25.145 9.922,25.17 ; 9.922,22.07 9.922,25.195 ; 9.922,22.07 9.947,22.045 ; 9.922,22.095 9.972,22.145 ; 9.922,22.095 9.947,22.07 ; 9.922,25.17 9.947,25.17 9.947,22.12 ; 9.922,25.195 9.972,25.145 ; 9.947,22.045 9.947,22.07 ; 9.947,22.07 9.972,22.095 9.947,22.12 ; 9.972,22.145 9.972,25.145 ; 9.972,23.095 9.997,23.12 ; 9.972,23.095 9.997,23.07 ; 9.972,23.145 9.997,23.17 ; 9.972,23.145 9.997,23.12 ; 9.972,23.57 9.997,23.595 ; 9.972,23.57 9.997,23.545 ; 9.997,23.02 9.972,23.045 9.997,23.07 ; 9.997,23.17 9.972,23.195 9.997,23.22 ; 9.997,23.22 9.972,23.245 9.997,23.27 ; 9.997,23.27 9.972,23.295 9.997,23.32 ; 9.997,23.32 9.972,23.345 9.997,23.37 ; 9.997,23.37 9.972,23.395 9.997,23.42 ; 9.997,23.42 9.972,23.445 9.997,23.47 ; 9.997,23.47 9.972,23.495 9.997,23.52 ; 9.997,23.52 9.997,23.545 ; 9.997,23.595 9.997,23.62 ; 9.997,23.62 9.972,23.645 9.997,23.67 ; 9.997,23.67 9.997,25.07 ; 11.097,45.52 11.097,45.42 11.122,45.395 ; 11.097,45.52 11.122,45.495 11.122,45.395 ; 11.122,45.395 14.497,45.395 14.497,45.22 14.547,45.17 14.522,45.145 ; 11.847,34.32 12.197,34.32 ; 11.847,34.32 11.847,34.395 11.897,34.395 ; 11.847,34.32 11.872,34.295 12.297,34.295 ; 11.847,37.87 11.847,37.895 ; 11.847,37.895 12.372,37.895 ; 11.847,37.895 11.897,37.945 ; 11.872,34.17 12.847,34.17 ; 11.872,34.17 11.897,34.145 12.972,34.145 ; 11.872,37.795 11.872,37.92 12.297,37.92 ; 11.872,37.795 11.972,37.795 11.972,37.57 ; 11.872,37.795 11.897,37.77 11.997,37.77 11.997,37.57 12.022,37.545 ; 11.897,34.395 11.897,34.12 13.147,34.12 ; 11.897,37.745 11.897,37.945 ; 11.897,37.745 12.047,37.745 ; 11.897,37.745 11.922,37.72 12.122,37.72 ; 11.897,37.945 12.197,37.945 ; 11.922,37.67 12.247,37.67 ; 11.922,37.67 11.947,37.645 12.347,37.645 ; 11.947,37.595 12.522,37.595 ; 11.947,37.595 11.972,37.57 ; 11.972,37.57 12.622,37.57 ; 11.997,34.095 13.497,34.095 13.522,34.07 ; 11.997,34.095 11.997,34.37 ; 12.022,37.545 12.747,37.545 ; 12.047,37.745 12.047,37.545 12.072,37.52 ; 12.047,37.745 12.072,37.72 12.072,37.52 ; 12.097,34.07 13.522,34.07 ; 12.097,34.07 12.097,34.345 ; 12.122,37.495 12.122,37.72 ; 12.147,44.57 12.172,44.545 12.722,44.545 12.722,44.17 12.672,44.17 ; 12.172,37.47 12.172,37.695 ; 12.172,37.87 12.422,37.87 ; 12.172,44.445 13.047,44.445 ; 12.172,44.445 12.197,44.42 ; 12.197,34.045 12.197,34.32 ; 12.197,44.42 13.522,44.42 ; 12.197,44.42 12.197,44.695 ; 12.197,44.695 12.122,44.695 12.147,44.67 12.272,44.67 ; 12.272,37.845 12.472,37.845 ; 12.297,34.02 12.297,34.295 ; 12.297,37.42 13.522,37.42 ; 12.347,37.645 12.347,37.42 12.372,37.395 ; 12.347,37.645 12.372,37.62 12.372,37.395 ; 12.347,37.82 12.522,37.82 ; 12.347,44.37 12.347,44.645 ; 12.372,37.395 13.497,37.395 13.522,37.42 ; 12.397,34.27 12.397,34.02 12.422,33.995 ; 12.397,34.27 12.422,34.245 12.422,33.995 ; 12.422,33.995 13.522,33.995 ; 12.422,37.37 13.497,37.37 ; 12.422,37.37 12.422,37.62 ; 12.422,37.795 12.572,37.795 ; 12.422,37.795 12.422,37.87 ; 12.472,37.77 12.622,37.77 ; 12.472,37.77 12.472,37.845 ; 12.497,34.245 12.497,33.995 12.522,33.97 ; 12.497,34.245 12.522,34.22 12.522,33.97 ; 12.497,37.345 13.472,37.345 13.497,37.37 ; 12.497,44.32 13.522,44.32 ; 12.522,33.695 12.522,33.845 ; 12.522,33.695 12.547,33.67 12.647,33.67 12.647,33.47 13.522,33.47 ; 12.522,33.845 12.622,33.845 ; 12.522,33.845 12.572,33.895 12.672,33.895 ; 12.522,33.97 13.497,33.97 13.522,33.995 ; 12.522,34.895 12.522,35.02 ; 12.522,35.02 12.947,35.02 12.972,34.995 ; 12.522,35.02 12.547,35.045 12.947,35.045 ; 12.522,36.095 13.022,36.095 ; 12.522,36.095 12.522,36.145 ; 12.522,36.095 12.547,36.07 13.072,36.07 ; 12.522,36.145 12.922,36.145 ; 12.522,36.145 12.572,36.195 ; 12.522,36.82 12.522,36.945 ; 12.522,36.945 12.947,36.945 12.972,36.92 ; 12.522,36.945 12.547,36.97 12.947,36.97 ; 12.522,37.745 12.647,37.745 12.647,37.67 12.747,37.67 12.747,37.595 12.847,37.595 12.847,37.245 ; 12.522,37.745 12.522,37.82 ; 12.522,38.52 12.522,38.72 ; 12.522,38.52 12.572,38.52 12.597,38.495 ; 12.522,38.52 12.547,38.495 12.597,38.495 ; 12.522,38.72 13.172,38.72 ; 12.522,38.72 12.547,38.745 13.097,38.745 ; 12.522,39.87 12.522,39.97 ; 12.522,39.87 12.547,39.845 12.722,39.845 12.722,40.17 ; 12.522,39.97 13.347,39.97 13.347,39.77 13.497,39.77 ; 12.522,39.97 12.547,39.995 13.322,39.995 13.322,39.795 13.422,39.695 13.522,39.695 ; 12.522,41.17 12.522,41.245 ; 12.522,41.245 13.197,41.245 ; 12.522,41.245 12.547,41.27 13.097,41.27 ; 12.522,41.745 13.497,41.745 13.522,41.72 ; 12.522,41.745 12.522,41.82 ; 12.522,41.745 12.547,41.72 13.522,41.72 ; 12.522,41.82 13.122,41.82 ; 12.522,41.82 12.547,41.845 13.047,41.845 ; 12.522,42.595 12.522,42.72 ; 12.522,42.72 12.947,42.72 12.972,42.695 ; 12.522,42.72 12.547,42.745 12.947,42.745 ; 12.522,43.42 12.572,43.42 ; 12.522,43.42 12.522,43.445 12.547,43.42 12.547,43.295 ; 12.522,43.42 12.547,43.395 12.647,43.395 ; 12.522,43.795 12.522,43.87 ; 12.522,43.795 12.547,43.77 13.497,43.77 13.522,43.745 ; 12.522,43.87 13.047,43.87 ; 12.522,43.87 12.547,43.895 12.972,43.895 ; 12.547,33.62 12.572,33.595 12.772,33.595 ; 12.547,34.795 12.547,35.095 ; 12.547,34.795 12.647,34.795 12.647,34.67 13.497,34.67 13.522,34.695 ; 12.547,34.795 12.572,34.77 12.672,34.77 12.672,34.645 13.497,34.645 ; 12.547,35.095 12.897,35.095 12.897,34.92 ; 12.547,35.095 12.622,35.17 ; 12.547,35.595 12.972,35.595 ; 12.547,35.595 12.572,35.57 13.072,35.57 ; 12.547,36.045 13.122,36.045 ; 12.547,36.045 12.547,36.17 12.847,36.17 ; 12.547,36.045 12.647,35.945 ; 12.547,36.745 12.547,37.02 ; 12.547,36.745 12.622,36.745 12.622,36.62 12.847,36.62 ; 12.547,36.745 12.572,36.72 12.647,36.72 12.647,36.595 13.497,36.595 13.522,36.62 ; 12.547,37.02 12.622,37.095 ; 12.547,38.42 12.547,38.77 ; 12.547,38.42 12.572,38.395 12.672,38.395 12.672,38.22 13.522,38.22 ; 12.547,38.77 13.022,38.77 ; 12.547,38.77 12.597,38.82 ; 12.547,39.47 13.272,39.47 ; 12.547,39.47 12.572,39.445 13.447,39.445 ; 12.547,39.795 12.547,40.045 ; 12.547,40.045 13.272,40.045 ; 12.547,40.045 12.647,40.145 ; 12.547,40.67 13.172,40.67 ; 12.547,40.67 12.572,40.645 13.447,40.645 ; 12.547,41.12 12.547,41.295 12.997,41.295 ; 12.547,41.12 12.572,41.095 13.472,41.095 13.497,41.07 ; 12.547,41.67 12.547,41.87 12.972,41.87 ; 12.547,42.52 12.547,42.795 ; 12.547,42.52 12.622,42.52 12.622,42.395 12.847,42.395 ; 12.547,42.52 12.572,42.495 12.647,42.495 12.647,42.37 13.497,42.37 13.522,42.395 ; 12.547,42.795 12.622,42.87 ; 12.547,43.295 13.072,43.295 ; 12.547,43.295 12.572,43.27 13.172,43.27 ; 12.547,43.745 13.522,43.745 ; 12.547,43.745 12.547,43.92 ; 12.547,43.92 12.897,43.92 ; 12.547,43.92 12.572,43.945 ; 12.572,33.57 12.572,33.92 ; 12.572,33.57 12.797,33.57 12.797,33.32 ; 12.572,33.57 12.597,33.545 12.872,33.545 ; 12.572,33.92 13.472,33.92 13.472,34.17 ; 12.572,33.92 12.597,33.945 ; 12.572,34.745 12.572,35.12 12.872,35.12 12.872,34.945 12.997,34.945 ; 12.572,34.745 12.697,34.745 12.697,34.62 13.472,34.62 13.497,34.645 ; 12.572,34.745 12.722,34.595 ; 12.572,36.195 12.747,36.195 ; 12.572,36.195 12.572,36.02 13.272,36.02 13.297,36.045 ; 12.572,36.695 12.572,37.045 12.872,37.045 12.872,36.87 ; 12.572,36.695 12.597,36.67 12.722,36.67 ; 12.572,37.32 13.472,37.32 ; 12.572,37.795 12.572,37.72 12.697,37.72 ; 12.572,37.795 12.597,37.77 12.597,37.695 ; 12.572,38.37 12.572,38.795 12.922,38.795 ; 12.572,38.37 12.722,38.37 ; 12.572,38.37 12.597,38.345 12.772,38.345 ; 12.572,39.395 13.647,39.395 ; 12.572,39.395 12.597,39.37 ; 12.572,39.745 12.572,40.07 13.222,40.07 ; 12.572,39.745 12.697,39.62 ; 12.572,40.82 12.522,40.82 12.547,40.795 12.647,40.795 ; 12.572,41.07 13.497,41.07 ; 12.572,41.07 12.572,41.295 12.597,41.32 ; 12.572,42.47 12.572,42.82 12.872,42.82 12.872,42.645 ; 12.572,42.47 12.597,42.445 12.722,42.445 ; 12.572,43.195 12.572,43.42 ; 12.572,43.195 12.597,43.17 ; 12.572,43.42 12.597,43.395 12.597,43.17 ; 12.572,43.695 12.572,43.945 ; 12.572,43.945 12.822,43.945 ; 12.597,33.52 12.922,33.52 ; 12.597,33.52 12.797,33.32 ; 12.597,33.945 13.497,33.945 ; 12.597,35.72 12.522,35.72 12.547,35.695 12.672,35.695 ; 12.597,36.645 12.597,37.07 12.847,37.07 12.847,36.895 12.872,36.87 ; 12.597,36.645 12.772,36.645 ; 12.597,36.645 12.797,36.445 ; 12.597,37.695 12.722,37.695 12.722,37.62 12.822,37.62 12.822,37.27 12.847,37.245 ; 12.597,38.32 12.822,38.32 ; 12.597,38.32 12.597,38.495 ; 12.597,38.32 12.622,38.295 12.922,38.295 ; 12.597,38.67 12.597,38.82 ; 12.597,38.67 12.697,38.57 ; 12.597,38.82 12.797,38.82 ; 12.597,39.37 13.797,39.37 ; 12.597,39.37 12.597,39.62 ; 12.597,39.62 12.522,39.62 12.547,39.595 12.822,39.595 12.822,39.27 12.872,39.22 ; 12.597,41.32 12.947,41.32 12.947,41.045 12.972,41.02 ; 12.597,41.32 12.597,41.045 12.747,41.045 12.747,41.345 ; 12.597,41.595 12.597,41.895 ; 12.597,41.595 12.722,41.595 12.772,41.645 12.772,41.92 ; 12.597,41.895 12.872,41.895 ; 12.597,42.42 12.597,42.845 12.847,42.845 12.847,42.67 12.872,42.645 ; 12.597,42.42 12.772,42.42 ; 12.597,42.42 12.797,42.22 ; 12.597,43.645 12.597,43.945 12.622,43.97 ; 12.597,43.645 12.897,43.345 ; 12.597,44.745 12.522,44.745 12.522,44.32 12.547,44.295 13.497,44.295 13.522,44.32 ; 12.622,33.72 12.622,33.495 12.997,33.495 ; 12.622,33.845 12.622,34.22 ; 12.622,35.17 12.797,35.17 ; 12.622,37.095 12.822,37.095 ; 12.622,37.57 12.622,37.32 12.647,37.295 ; 12.622,37.57 12.647,37.545 12.647,37.295 ; 12.622,37.77 12.622,37.695 12.672,37.645 ; 12.622,37.77 12.672,37.72 12.672,37.645 ; 12.622,38.27 12.797,38.095 ; 12.622,40.995 12.622,41.32 12.647,41.345 ; 12.622,40.995 12.722,40.995 12.747,40.97 ; 12.622,40.995 12.872,40.745 ; 12.622,42.87 12.822,42.87 ; 12.622,43.97 12.722,43.97 ; 12.647,35.42 13.497,35.42 ; 12.647,35.945 13.272,35.945 13.272,35.845 13.397,35.845 ; 12.647,36.895 12.647,37.095 12.672,37.12 ; 12.647,36.895 12.672,36.92 12.672,37.12 ; 12.647,37.295 13.447,37.295 ; 12.647,39.345 13.947,39.345 ; 12.647,40.145 13.072,40.145 ; 12.647,40.545 13.472,40.545 13.497,40.52 ; 12.647,40.545 12.647,40.795 ; 12.647,41.345 12.647,40.97 12.747,40.97 ; 12.647,41.345 12.747,41.345 ; 12.647,41.92 12.647,41.545 12.722,41.545 12.972,41.295 12.972,41.02 ; 12.647,41.92 12.772,41.92 ; 12.647,42.67 12.647,42.87 12.672,42.895 ; 12.647,42.67 12.672,42.695 12.672,42.895 ; 12.647,43.145 13.472,43.145 13.497,43.12 ; 12.647,43.145 12.647,43.395 ; 12.672,37.12 12.747,37.12 ; 12.672,37.645 12.797,37.645 ; 12.672,42.895 12.747,42.895 ; 12.697,33.645 12.747,33.595 12.747,33.37 13.522,33.37 ; 12.697,35.92 13.322,35.92 ; 12.697,37.72 12.697,37.645 12.797,37.545 ; 12.697,37.72 12.772,37.645 12.772,37.57 ; 12.697,38.57 13.172,38.57 ; 12.697,39.62 12.797,39.62 ; 12.697,40.52 13.497,40.52 ; 12.697,43.12 13.497,43.12 ; 12.722,34.595 13.472,34.595 ; 12.722,35.395 13.472,35.395 13.497,35.42 ; 12.722,36.67 12.722,36.52 13.472,36.52 13.497,36.545 ; 12.722,36.67 12.747,36.645 12.747,36.495 13.472,36.495 ; 12.722,38.37 12.747,38.345 12.747,38.145 13.497,38.145 ; 12.722,39.695 12.622,39.695 12.622,40.12 13.122,40.12 ; 12.722,39.695 12.697,39.72 12.597,39.72 12.597,40.095 13.172,40.095 ; 12.722,40.17 12.997,40.17 ; 12.722,40.17 12.697,40.145 12.697,39.345 12.747,39.295 ; 12.722,40.77 12.722,40.52 12.747,40.495 ; 12.722,40.77 12.747,40.745 12.747,40.495 ; 12.722,42.445 12.722,42.295 13.472,42.295 13.497,42.32 ; 12.722,42.445 12.747,42.42 12.747,42.27 13.472,42.27 ; 12.747,34.72 12.597,34.72 12.597,35.145 12.847,35.145 ; 12.747,34.72 12.747,34.595 12.797,34.545 ; 12.747,34.72 12.772,34.695 12.772,34.57 13.447,34.57 13.447,35.02 ; 12.747,35.895 13.147,35.895 ; 12.747,35.895 12.747,36.195 ; 12.747,37.27 13.397,37.27 13.397,37.795 ; 12.747,37.27 12.747,37.545 ; 12.747,37.545 12.772,37.57 ; 12.747,37.545 12.772,37.52 12.797,37.545 ; 12.747,38.545 13.122,38.545 ; 12.747,40.97 12.747,40.87 12.822,40.87 12.822,40.795 12.897,40.795 12.897,40.445 ; 12.747,43.37 12.747,43.12 12.772,43.095 ; 12.747,43.37 12.772,43.345 12.772,43.095 ; 12.772,33.595 12.772,33.345 13.497,33.345 13.522,33.37 ; 12.772,36.645 12.772,36.47 13.447,36.47 13.447,36.945 13.347,36.945 13.322,36.97 ; 12.772,36.645 12.797,36.62 12.797,36.445 ; 12.772,38.345 12.772,38.12 13.472,38.12 13.472,38.47 ; 12.772,38.345 12.797,38.32 12.797,38.095 ; 12.772,42.42 12.772,42.245 13.447,42.245 13.447,42.72 13.347,42.72 13.322,42.745 ; 12.772,42.42 12.797,42.395 12.797,42.22 ; 12.797,33.32 13.497,33.32 ; 12.797,34.545 13.422,34.545 13.422,35.07 ; 12.797,34.97 12.797,35.17 ; 12.797,34.97 12.972,34.97 12.997,34.945 ; 12.797,35.37 13.472,35.37 ; 12.797,36.445 13.422,36.445 13.422,36.995 ; 12.797,38.095 13.447,38.095 13.447,38.495 13.347,38.495 13.347,38.62 ; 12.797,38.52 12.797,38.82 ; 12.797,38.52 13.047,38.52 ; 12.797,39.27 12.797,39.62 ; 12.797,39.62 12.847,39.57 12.847,39.245 12.997,39.245 ; 12.797,40.745 12.797,40.495 12.822,40.47 ; 12.797,40.745 12.822,40.72 12.822,40.47 ; 12.797,42.22 13.422,42.22 13.422,42.77 ; 12.822,35.87 13.072,35.87 ; 12.822,36.895 12.822,37.095 ; 12.822,36.895 12.972,36.895 12.997,36.87 ; 12.822,37.095 12.947,36.97 ; 12.822,38.32 12.822,38.095 12.847,38.07 ; 12.822,38.32 12.847,38.295 12.847,38.07 ; 12.822,41.62 13.522,41.62 ; 12.822,42.67 12.822,42.87 ; 12.822,42.67 12.972,42.67 12.997,42.645 ; 12.822,42.87 12.947,42.745 ; 12.822,43.07 12.822,43.345 ; 12.847,33.295 13.472,33.295 13.472,33.595 ; 12.847,35.145 12.847,34.97 12.897,34.92 ; 12.847,35.145 12.947,35.045 ; 12.847,36.42 12.847,36.62 ; 12.847,37.245 13.372,37.245 ; 12.847,38.07 13.422,38.07 13.422,38.545 ; 12.847,42.195 13.397,42.195 13.397,42.795 13.297,42.795 13.297,42.92 13.197,42.92 13.197,43.245 13.172,43.27 ; 12.847,42.195 12.847,42.395 ; 12.847,44.22 13.447,44.22 13.447,44.57 ; 12.872,33.545 12.872,33.295 12.897,33.27 ; 12.872,33.545 12.897,33.52 12.897,33.27 ; 12.872,35.345 13.447,35.345 ; 12.872,36.87 12.997,36.87 ; 12.872,39.22 12.872,39.57 ; 12.872,39.22 13.022,39.22 ; 12.872,40.745 12.947,40.745 12.947,40.445 12.972,40.42 ; 12.872,42.645 12.997,42.645 ; 12.872,43.645 13.522,43.645 ; 12.897,33.895 13.447,33.895 ; 12.897,34.92 12.997,34.92 13.022,34.895 ; 12.897,36.395 13.372,36.395 ; 12.897,38.045 13.397,38.045 ; 12.897,40.445 13.497,40.445 13.522,40.42 ; 12.897,42.17 13.372,42.17 ; 12.897,43.345 12.997,43.345 ; 12.922,33.52 12.922,33.27 12.947,33.245 ; 12.922,33.52 12.947,33.495 12.947,33.245 ; 12.922,38.295 12.922,38.045 12.947,38.02 ; 12.922,38.295 12.947,38.27 12.947,38.02 ; 12.922,41.595 13.497,41.595 13.522,41.62 ; 12.922,43.045 13.497,43.045 13.522,43.02 12.997,43.02 ; 12.922,44.195 13.422,44.195 ; 12.947,33.245 13.422,33.245 ; 12.947,34.47 13.347,34.47 ; 12.947,34.87 12.947,35.045 ; 12.947,34.87 13.022,34.87 13.047,34.845 ; 12.947,35.32 13.397,35.32 ; 12.947,36.97 12.947,36.82 13.022,36.82 ; 12.947,38.02 13.347,38.02 ; 12.947,42.745 12.947,42.595 13.022,42.595 ; 12.947,43.62 13.497,43.62 13.522,43.645 ; 12.972,34.145 12.972,33.895 12.997,33.87 ; 12.972,34.145 12.997,34.12 12.997,33.87 ; 12.972,34.995 12.972,34.845 13.047,34.845 ; 12.972,36.37 13.322,36.37 ; 12.972,36.77 12.972,36.92 ; 12.972,36.77 13.047,36.77 ; 12.972,39.545 12.972,39.17 13.047,39.095 ; 12.972,39.545 12.997,39.52 12.997,39.145 13.097,39.145 13.097,39.07 13.197,39.07 13.197,38.97 13.272,38.97 13.297,38.945 ; 12.972,40.42 13.522,40.42 ; 12.972,41.87 12.972,41.595 12.997,41.57 ; 12.972,41.87 12.997,41.845 12.997,41.57 ; 12.972,42.145 13.322,42.145 ; 12.972,42.545 12.972,42.695 ; 12.972,42.545 13.047,42.545 ; 12.997,33.22 13.372,33.22 ; 12.997,33.22 12.997,33.495 ; 12.997,33.87 13.397,33.87 ; 12.997,34.795 12.997,34.945 ; 12.997,34.795 13.047,34.795 13.072,34.77 ; 12.997,34.795 13.022,34.77 13.072,34.77 ; 12.997,36.72 12.997,36.87 ; 12.997,36.72 13.047,36.72 13.072,36.695 ; 12.997,36.72 13.022,36.695 13.072,36.695 ; 12.997,37.22 13.297,37.22 ; 12.997,39.245 13.022,39.27 13.047,39.245 ; 12.997,39.245 13.122,39.12 13.122,39.045 13.222,39.045 13.222,38.945 13.297,38.945 ; 12.997,40.17 12.997,39.92 13.022,39.895 ; 12.997,40.17 13.022,40.145 13.022,39.895 ; 12.997,41.57 13.497,41.57 ; 12.997,42.495 12.997,42.645 ; 12.997,42.495 13.047,42.495 13.072,42.47 ; 12.997,42.495 13.022,42.47 13.072,42.47 ; 12.997,43.02 12.997,43.345 ; 13.022,34.445 13.022,34.695 13.047,34.72 13.022,34.745 ; 13.022,34.445 13.272,34.445 ; 13.022,34.745 13.022,34.895 ; 13.022,36.67 13.022,36.82 ; 13.022,38.77 13.047,38.745 13.047,38.52 ; 13.022,39.22 13.022,39.12 13.147,39.12 ; 13.022,39.22 13.047,39.245 ; 13.022,39.895 13.422,39.895 13.422,39.67 ; 13.022,42.445 13.022,42.595 ; 13.022,43.595 13.497,43.595 ; 13.022,44.17 13.372,44.17 ; 13.047,33.845 13.222,33.845 13.247,33.87 13.247,34.12 ; 13.047,35.295 13.347,35.295 ; 13.047,36.77 13.047,36.37 13.072,36.345 ; 13.047,37.995 13.272,37.995 13.272,38.295 ; 13.047,39.095 13.172,39.095 13.172,38.995 13.272,38.995 ; 13.047,39.245 14.047,39.245 14.072,39.22 ; 13.047,42.545 13.047,42.145 13.072,42.12 ; 13.047,43.87 13.047,43.595 13.072,43.57 ; 13.047,43.87 13.072,43.845 13.072,43.57 ; 13.072,33.195 13.322,33.195 ; 13.072,35.87 13.072,36.07 ; 13.072,36.345 13.072,36.695 ; 13.072,42.12 13.072,42.47 ; 13.072,43.57 13.472,43.57 13.472,43.87 ; 13.097,38.745 13.122,38.72 13.122,38.545 ; 13.097,40.395 13.522,40.395 13.522,40.42 ; 13.097,40.995 13.097,41.27 ; 13.097,41.545 13.472,41.545 ; 13.122,36.045 13.147,36.02 13.147,35.895 ; 13.122,39.87 13.447,39.87 ; 13.122,39.87 13.122,40.12 ; 13.122,43.845 13.122,43.57 13.147,43.545 ; 13.122,43.845 13.147,43.82 13.147,43.545 ; 13.147,33.795 13.147,34.12 ; 13.147,33.795 13.272,33.795 ; 13.147,39.12 13.272,38.995 ; 13.147,39.22 14.072,39.22 ; 13.147,43.545 13.447,43.545 ; 13.147,44.12 13.247,44.12 ; 13.172,36.62 13.522,36.62 ; 13.172,36.62 13.172,36.295 13.247,36.295 13.247,35.87 13.372,35.87 13.372,35.32 13.347,35.295 ; 13.172,36.62 13.147,36.595 13.147,36.32 13.222,36.32 ; 13.172,38.57 13.172,38.72 ; 13.172,38.57 13.222,38.62 ; 13.172,38.72 13.197,38.695 ; 13.172,40.095 13.172,39.87 13.197,39.845 ; 13.172,40.095 13.197,40.07 13.197,39.845 ; 13.172,41.52 13.422,41.52 ; 13.172,42.395 13.522,42.395 ; 13.172,42.395 13.172,42.07 13.272,42.07 13.272,41.97 13.347,41.97 13.447,41.87 ; 13.172,42.395 13.147,42.37 13.147,42.095 13.247,42.095 13.347,41.995 ; 13.172,43.27 13.172,42.945 13.272,42.945 13.272,42.82 ; 13.197,38.695 13.272,38.77 13.322,38.77 ; 13.197,39.845 13.447,39.845 13.472,39.82 ; 13.197,40.97 13.197,41.245 ; 13.222,33.745 13.222,34.095 13.247,34.12 ; 13.222,33.745 13.322,33.745 13.322,33.195 ; 13.222,34.42 13.472,34.17 ; 13.222,36.22 13.222,36.645 ; 13.222,36.32 13.297,36.245 ; 13.222,36.645 13.197,36.62 13.197,36.27 13.272,36.27 13.272,35.995 ; 13.222,38.62 13.222,38.72 13.297,38.72 ; 13.222,38.62 13.272,38.57 ; 13.222,40.07 13.222,39.845 13.247,39.82 ; 13.222,40.07 13.247,40.045 13.247,39.82 ; 13.222,42.42 13.222,42.02 13.322,42.02 13.322,41.895 ; 13.247,34.12 13.497,34.12 ; 13.247,35.145 13.347,35.145 13.347,34.47 ; 13.247,35.145 13.322,35.07 13.422,35.07 ; 13.247,35.97 13.272,35.995 ; 13.247,35.97 13.297,35.92 13.297,35.82 13.397,35.82 13.447,35.77 ; 13.247,37.195 13.322,37.12 ; 13.247,37.845 13.247,38.27 13.272,38.295 ; 13.247,37.845 13.297,37.795 13.397,37.795 ; 13.247,37.97 13.272,37.945 ; 13.247,39.82 13.472,39.82 ; 13.247,42.97 13.322,42.895 ; 13.247,43.52 13.397,43.52 ; 13.247,44.12 13.272,44.145 13.272,44.445 13.497,44.445 13.522,44.42 ; 13.247,44.12 13.422,43.945 ; 13.247,44.795 13.372,44.67 ; 13.272,33.695 13.272,33.795 ; 13.272,33.695 13.372,33.695 13.372,33.22 ; 13.272,33.695 13.322,33.645 13.422,33.645 13.422,33.245 ; 13.272,33.795 13.472,33.595 ; 13.272,37.045 13.372,37.045 13.372,36.395 ; 13.272,37.045 13.322,36.995 13.422,36.995 ; 13.272,37.945 13.272,37.82 13.372,37.82 13.372,37.245 ; 13.272,38.57 13.272,38.995 ; 13.272,38.57 13.397,38.57 13.397,38.045 ; 13.272,39.195 13.272,39.47 ; 13.272,40.045 13.272,39.82 13.297,39.795 ; 13.272,40.045 13.447,39.87 ; 13.272,42.82 13.372,42.82 13.372,42.17 ; 13.272,42.82 13.322,42.77 13.422,42.77 ; 13.297,34.245 13.397,34.245 13.397,33.87 ; 13.297,34.245 13.322,34.22 13.422,34.22 13.422,33.895 13.397,33.87 ; 13.297,36.045 13.297,36.245 ; 13.297,36.045 13.222,36.045 13.222,35.895 13.347,35.895 13.347,35.745 ; 13.297,37.22 13.297,37.545 13.522,37.545 ; 13.297,37.22 13.322,37.245 13.322,37.57 13.497,37.57 13.522,37.545 ; 13.297,37.77 13.397,37.77 13.447,37.72 ; 13.297,37.77 13.347,37.72 13.447,37.72 ; 13.297,38.72 13.297,38.945 ; 13.297,39.795 13.472,39.795 13.497,39.77 ; 13.297,40.945 13.297,41.22 ; 13.297,40.945 13.497,40.945 13.522,40.92 ; 13.297,44.145 13.297,44.47 13.497,44.47 ; 13.297,44.62 13.397,44.62 13.397,44.195 13.372,44.17 ; 13.297,44.62 13.322,44.595 13.422,44.595 13.422,44.195 ; 13.322,34.82 13.347,34.845 13.522,34.845 ; 13.322,35.045 13.422,35.045 13.447,35.02 ; 13.322,35.045 13.347,35.02 13.447,35.02 ; 13.322,35.92 13.322,35.795 13.422,35.795 13.422,35.345 13.397,35.32 ; 13.322,35.92 13.397,35.845 ; 13.322,36.095 13.322,36.17 ; 13.322,36.37 13.322,36.745 ; 13.322,36.745 13.347,36.77 13.522,36.77 ; 13.322,36.97 13.322,37.12 ; 13.322,36.97 13.422,36.97 13.472,36.92 ; 13.322,38.52 13.422,38.52 13.472,38.47 ; 13.322,38.52 13.372,38.47 13.472,38.47 ; 13.322,38.77 13.322,38.87 ; 13.322,38.77 13.297,38.745 13.247,38.745 13.247,38.595 13.372,38.595 13.372,38.045 13.347,38.02 ; 13.322,41.895 13.422,41.895 13.422,41.52 ; 13.322,41.895 13.347,41.87 13.447,41.87 ; 13.322,42.145 13.322,42.52 ; 13.322,42.52 13.347,42.545 13.522,42.545 ; 13.322,42.745 13.322,42.895 ; 13.322,42.745 13.422,42.745 13.472,42.695 ; 13.347,34.47 13.472,34.595 ; 13.347,35.295 13.347,35.595 13.522,35.595 ; 13.347,35.745 13.447,35.745 13.472,35.72 ; 13.347,35.745 13.372,35.72 13.472,35.72 ; 13.347,38.02 13.347,38.345 13.522,38.345 ; 13.347,38.62 13.422,38.545 ; 13.372,36.395 13.472,36.495 ; 13.372,42.17 13.472,42.27 ; 13.372,44.17 13.372,44.67 ; 13.397,35.32 13.397,35.845 ; 13.397,38.045 13.497,38.145 ; 13.397,39.17 13.397,39.495 13.497,39.495 ; 13.397,39.17 13.372,39.195 13.372,39.47 13.472,39.47 13.472,39.82 ; 13.397,41.195 13.397,40.945 13.422,40.92 ; 13.397,41.195 13.422,41.17 13.422,40.92 ; 13.397,43.52 13.422,43.545 13.422,43.945 ; 13.422,33.245 13.497,33.32 ; 13.422,40.92 13.522,40.92 ; 13.422,41.52 13.447,41.545 13.447,41.87 ; 13.422,44.195 13.497,44.27 ; 13.447,33.895 13.497,33.945 ; 13.447,35.345 13.447,35.77 ; 13.447,35.345 13.472,35.37 ; 13.447,37.295 13.447,37.72 ; 13.447,37.295 13.472,37.32 ; 13.447,39.445 13.497,39.495 ; 13.447,40.645 13.472,40.62 ; 13.447,43.545 13.497,43.595 ; 13.472,34.595 13.472,34.97 ; 13.472,35.37 13.472,35.72 ; 13.472,36.495 13.472,36.92 ; 13.472,37.32 13.472,37.67 ; 13.472,41.545 13.497,41.57 ; 13.472,42.27 13.472,42.695 ; 13.497,33.32 13.497,33.545 ; 13.497,33.945 13.497,34.12 ; 13.497,34.645 13.497,34.92 ; 13.497,35.42 13.497,35.67 ; 13.497,36.545 13.497,36.845 ; 13.497,37.37 13.497,37.62 ; 13.497,38.145 13.497,38.42 ; 13.497,39.495 13.497,39.77 ; 13.497,41.07 13.497,40.92 13.522,40.895 13.522,40.92 ; 13.497,41.57 13.497,41.795 ; 13.497,42.32 13.497,42.62 ; 13.497,43.595 13.497,43.82 ; 13.497,44.27 13.497,44.47 ; 13.522,33.37 13.522,33.47 ; 13.522,33.995 13.522,34.07 ; 13.522,34.695 13.522,34.845 ; 13.522,35.47 13.522,35.595 ; 13.522,36.62 13.522,36.77 ; 13.522,37.42 13.522,37.545 ; 13.522,38.22 13.522,38.345 ; 13.522,39.57 13.522,39.695 ; 13.522,41.62 13.522,41.72 ; 13.522,42.395 13.522,42.545 ; 13.522,43.645 13.522,43.745 ; 13.522,44.32 13.522,44.42 ; 13.647,39.12 13.647,39.395 ; 13.797,39.095 13.797,39.37 ; 13.797,39.095 14.072,39.095 14.097,39.07 ; 13.947,39.07 13.947,39.345 ; 13.947,39.07 14.097,39.07 ; 14.072,39.22 14.072,39.07 14.097,39.045 14.097,39.07 ; 14.297,20.895 14.297,21.02 ; 14.297,45.37 14.297,45.495 ; 14.347,20.92 14.347,21.02 14.447,21.12 ; 14.347,45.47 14.347,45.37 14.422,45.295 ; 14.397,20.945 14.397,21.07 14.572,21.07 14.547,21.095 ; 14.397,20.945 14.422,20.97 14.422,21.095 14.547,21.095 ; 14.397,45.445 14.422,45.42 ; 14.422,45.295 14.422,45.42 ; 14.422,45.295 14.547,45.295 14.572,45.27 14.572,21.12 14.547,21.095 ; 14.447,20.97 14.447,21.12 ; 14.447,21.12 14.597,21.12 ; 14.472,21.17 14.597,21.17 14.622,21.145 ; 14.472,21.17 14.497,21.195 ; 14.472,21.17 14.497,21.145 ; 14.497,21.145 14.622,21.145 ; 14.522,21.245 14.647,21.245 ; 14.522,21.245 14.547,21.27 ; 14.522,21.295 14.647,21.295 ; 14.522,21.295 14.522,21.32 ; 14.522,21.295 14.547,21.27 ; 14.522,21.32 14.672,21.32 ; 14.522,21.32 14.547,21.345 14.522,21.37 ; 14.522,21.37 14.672,21.37 ; 14.522,21.37 14.522,21.395 ; 14.522,21.395 14.647,21.395 ; 14.522,21.395 14.547,21.42 ; 14.522,21.445 14.647,21.445 ; 14.522,21.445 14.522,21.47 ; 14.522,21.445 14.547,21.42 ; 14.522,21.47 14.672,21.47 ; 14.522,21.47 14.547,21.495 14.522,21.52 ; 14.522,21.52 14.672,21.52 ; 14.522,21.52 14.522,21.545 ; 14.522,21.545 14.647,21.545 ; 14.522,21.545 14.547,21.57 ; 14.522,21.595 14.647,21.595 ; 14.522,21.595 14.522,21.62 ; 14.522,21.595 14.547,21.57 ; 14.522,21.62 14.672,21.62 ; 14.522,21.62 14.547,21.645 14.522,21.67 ; 14.522,21.67 14.672,21.67 ; 14.522,21.67 14.522,21.695 ; 14.522,21.695 14.647,21.695 ; 14.522,21.695 14.547,21.72 ; 14.522,21.745 14.647,21.745 ; 14.522,21.745 14.522,21.77 ; 14.522,21.745 14.547,21.72 ; 14.522,21.77 14.672,21.77 ; 14.522,21.77 14.547,21.795 14.522,21.82 ; 14.522,21.82 14.672,21.82 ; 14.522,21.82 14.522,21.845 ; 14.522,21.845 14.647,21.845 ; 14.522,21.845 14.547,21.87 ; 14.522,21.895 14.647,21.895 ; 14.522,21.895 14.522,21.92 ; 14.522,21.895 14.547,21.87 ; 14.522,21.92 14.672,21.92 ; 14.522,21.92 14.547,21.945 14.522,21.97